# Altium PCB Receiver.PcbDoc
Units mm, origin at the board's own origin, x right, y up, seen from the top; angles counter-clockwise.
Board outline 52.3 x 65 mm, 2 copper layers (Top Layer, Bottom Layer); 12 components, 10 nets, 72 pads, 108 vias.
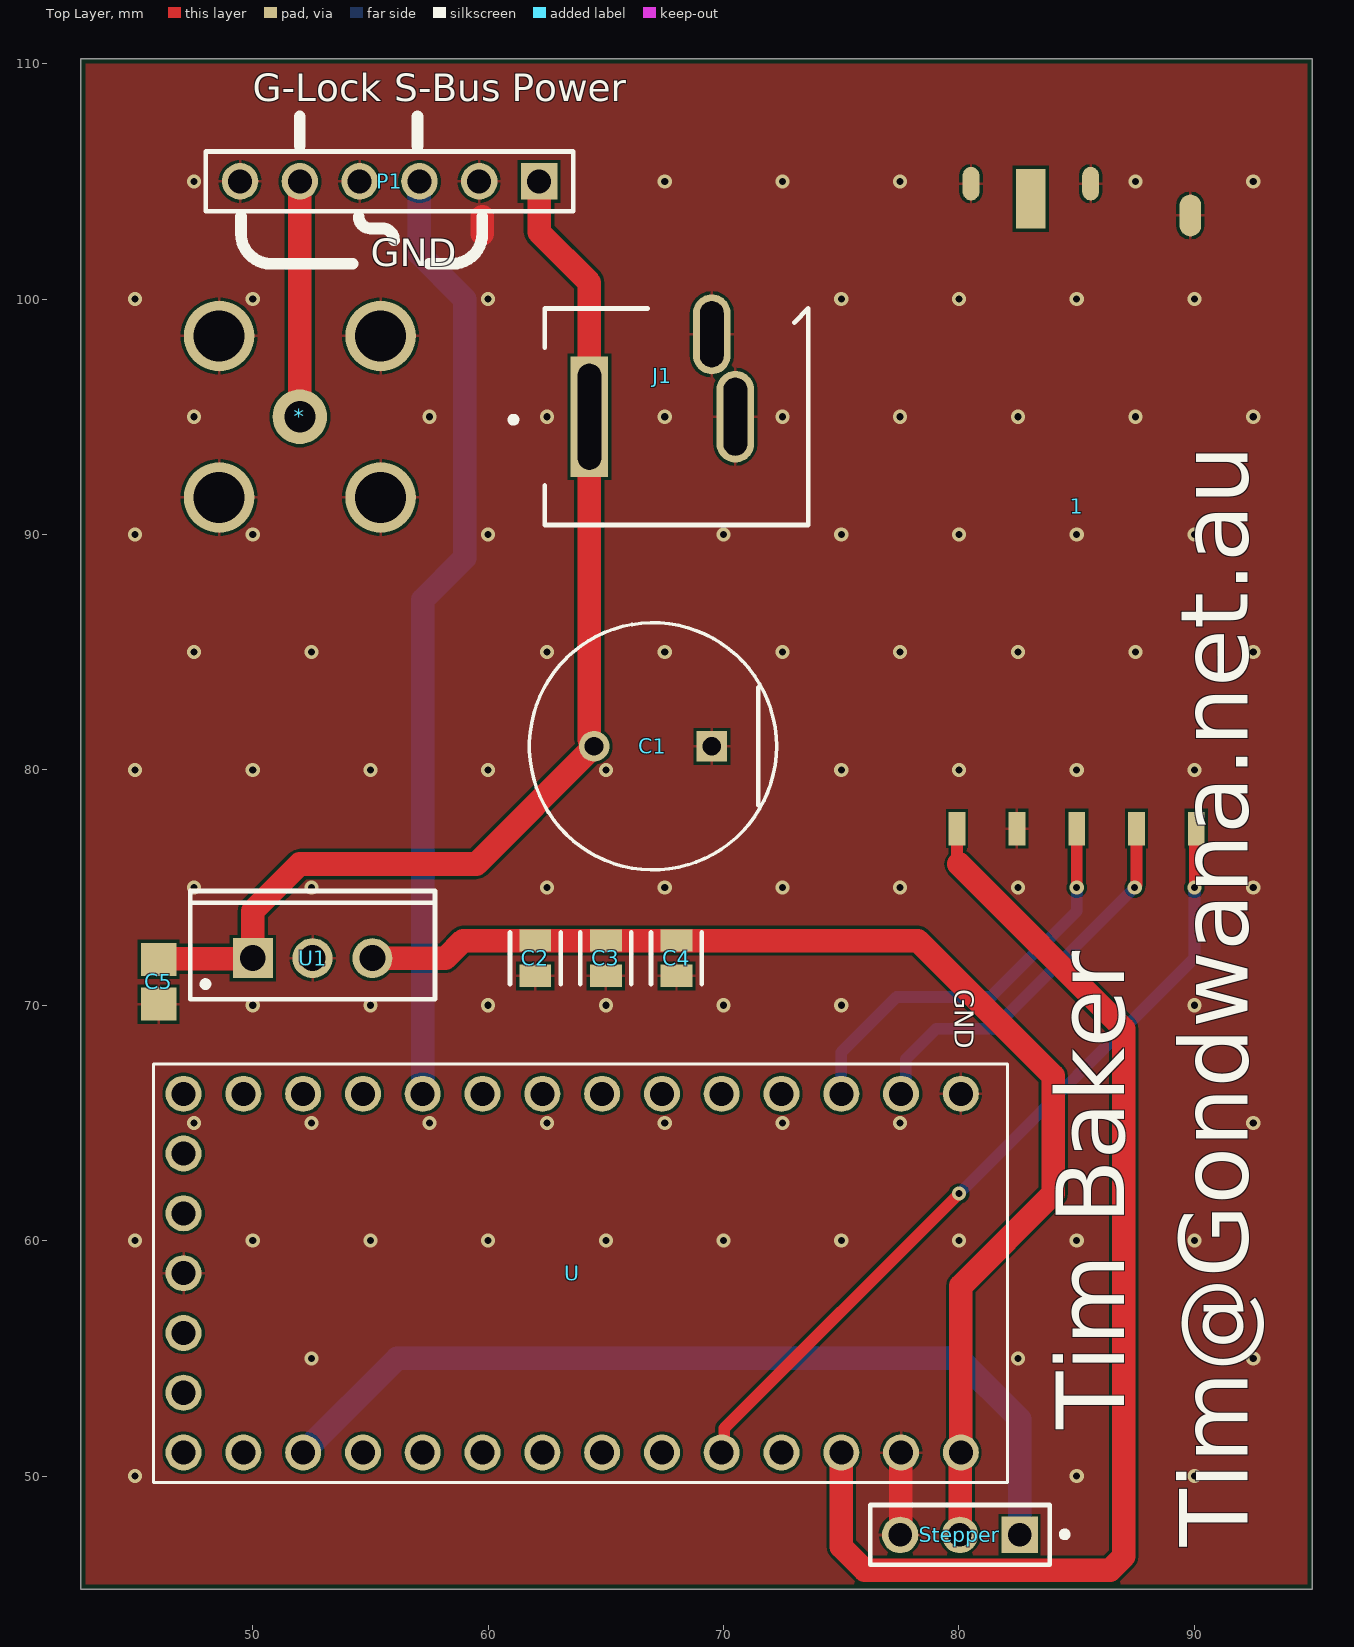
[diagram p0: Top Layer view]
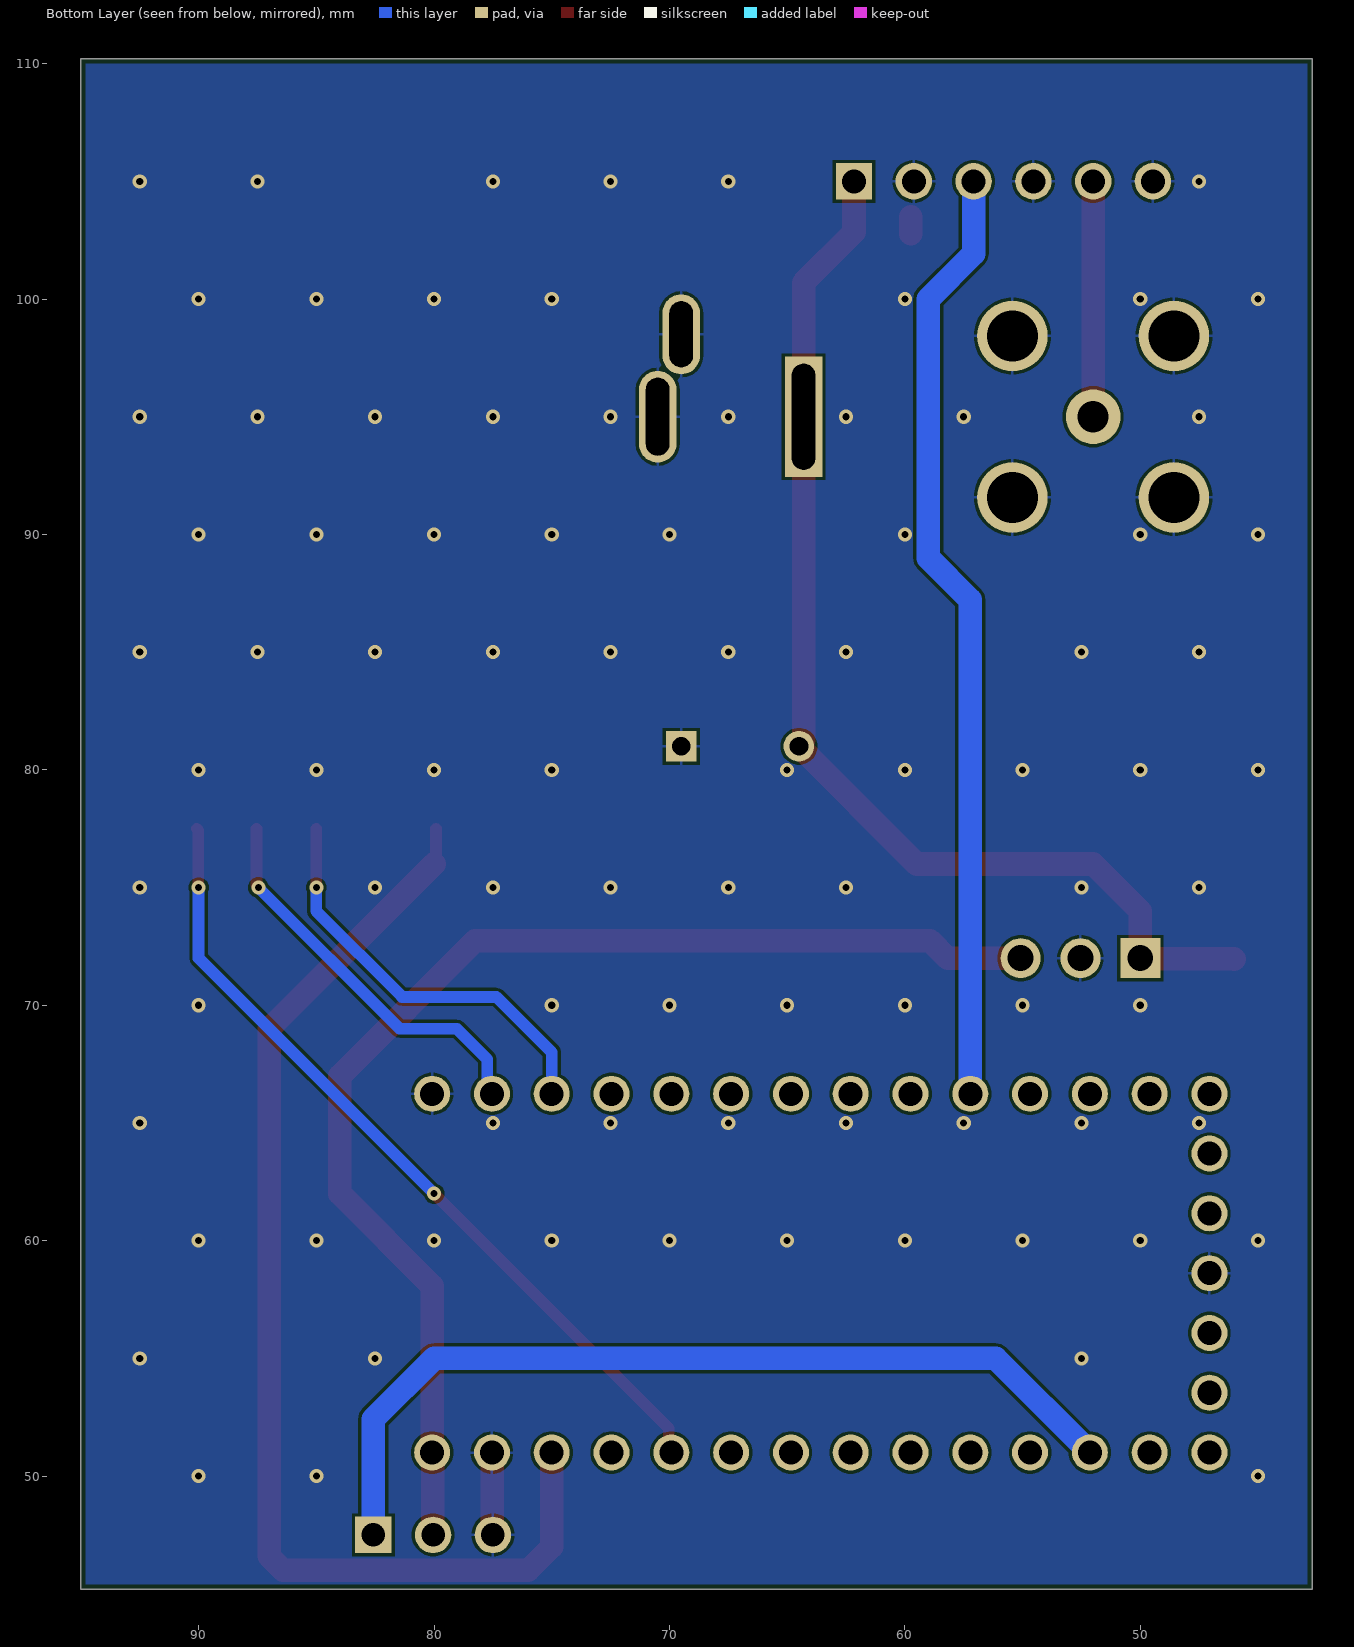
[diagram p1: Bottom Layer view, seen from below]
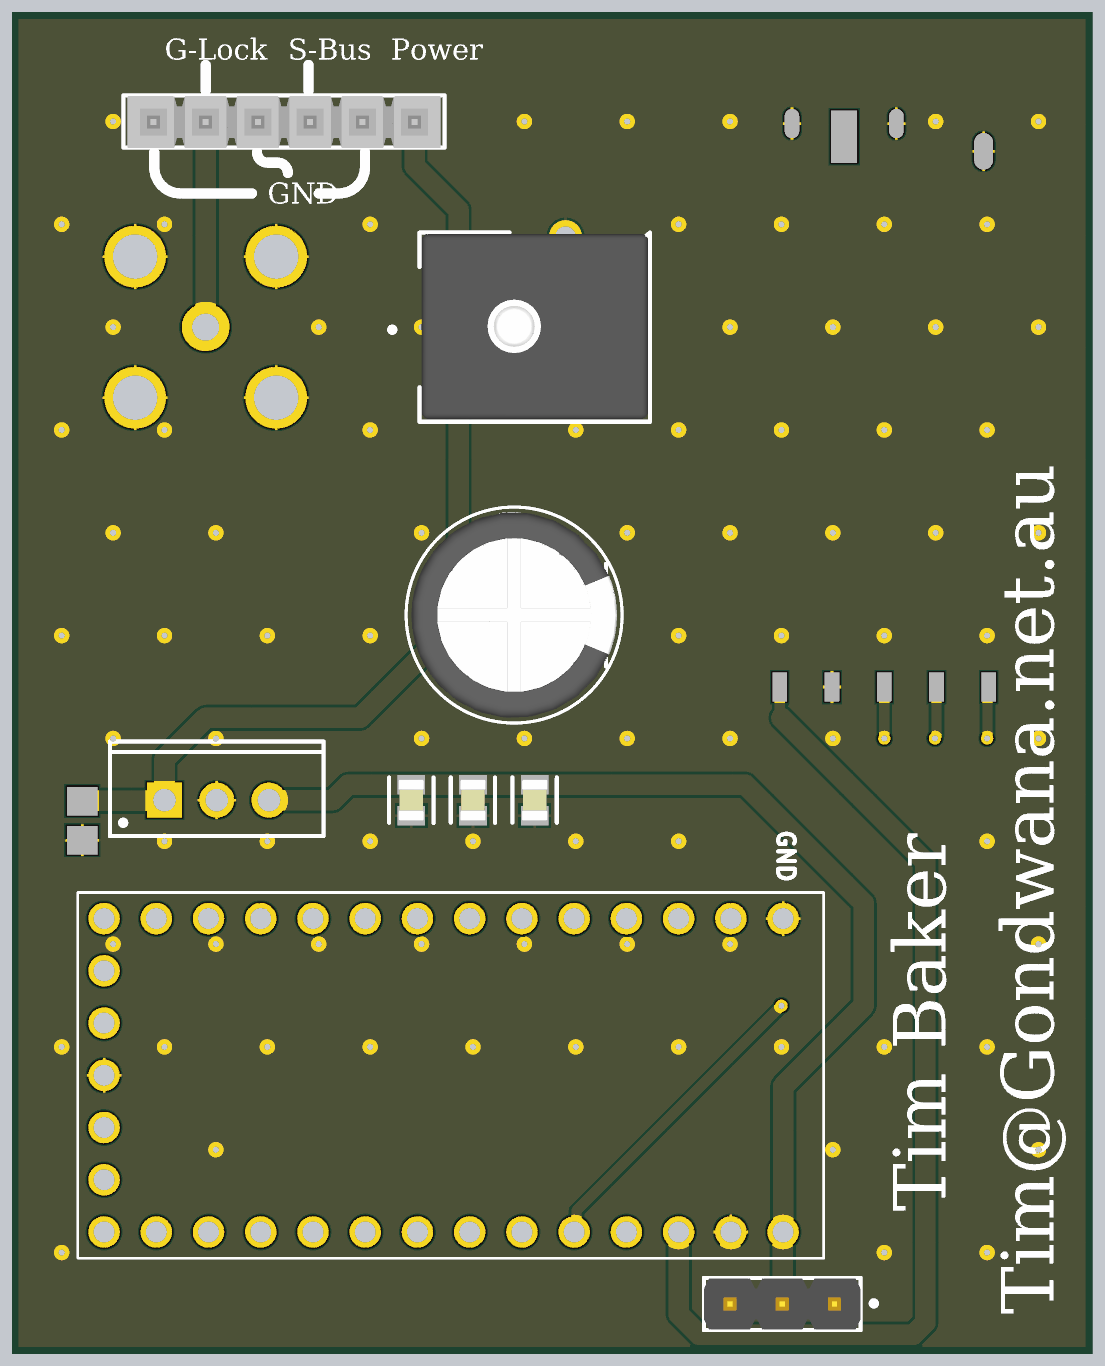
[diagram p2: 3D render of the assembled board from above, using the file's embedded part models]

## Layer stack, top to bottom
Top Solder: solder mask 0.0102, Solder Resist, Dk 3.5
Top Layer: signal copper 0.0356
Dielectric 1: dielectric 0.32, FR-4, Dk 4.8
Bottom Layer: signal copper 0.0356
Bottom Solder: solder mask 0.0102, Solder Resist, Dk 3.5

## Board outline
42.7,45.2 42.7,110.2 95,110.2 95,45.2

## Design rules (kind name [scope] priority, off if disabled: settings)
BoardOutlineClearance [All] p1: gap=0.2 ignorepadtopadclearanceinfootprint=FALSE
Clearance [All] p1: gap=0.127 ignorepadtopadclearanceinfootprint=FALSE except(0.25: Arc-Hole Track-Hole SMDPad-Hole THPad-Hole Via-Hole Fill-Hole Poly-Hole Region-Hole Text-Hole)
ComponentClearance [All] p1: gap=0.127 collisioncheckmode=3 verticalgap=0.127 showdistances=TRUE
DiffPairsRouting [All] p1: maxlimit=0.254 minlimit=0.127 mostfreqgap=0.127 toplayer_minwidth=0.127 toplayer_maxwidth=25.4 toplayer_prefwidth=0.127 bottomlayer_minwidth=0.127 bottomlayer_maxwidth=25.4 bottomlayer_prefwidth=0.127 maxuncoupledlength=12.7
Height [All] p1: minheight=0 maxheight=1816.048 prefheight=12.7
HoleSize [All] p1: absolutevalues=TRUE maxlimit=6.3 minlimit=0.3 maxpercent=80.000 minpercent=20.000
HoleToHoleClearance [All] p1: gap=0.25 allowstackedmicrovias=FALSE
MinimumAnnularRing [All] p1: minimumring=0.076
MinimumSolderMaskSliver [All] p1: minsoldermaskwidth=0
PlaneClearance [All] p1: clearance=0.127
PlaneConnect PlaneConnectPowerPads [InPadClass('PowerPads')] p1: planeconnectstyle=Direct reliefexpansion=0.508 reliefentries=4 reliefconductorwidth=0.254 reliefairgap=0.254
PlaneConnect [All] p2: pad.planeconnectstyle=Relief pad.reliefexpansion=0.3 pad.reliefentries=4 pad.reliefconductorwidth=0.127 pad.reliefairgap=0.127 via.planeconnectstyle=Direct via.reliefexpansion=0.3 via.reliefentries=4 via.reliefconductorwidth=0.127 via.reliefairgap=0.127
PolygonConnect PolygonConnectPowerPads [All vs (InPadClass('PowerPads'))] p1: connectstyle=Direct reliefconductorwidth=0.254 reliefentries=4 polygonreliefangle="90 Angle" airgapwidth=0.254
PolygonConnect [All] p2: thpad.connectstyle=Relief thpad.reliefconductorwidth=0.127 thpad.reliefentries=4 thpad.polygonreliefangle="90 Angle" thpad.airgapwidth=0.127 smdpad.connectstyle=Relief smdpad.reliefconductorwidth=0.127 smdpad.reliefentries=4 smdpad.polygonreliefangle="90 Angle" smdpad.airgapwidth=0.127 via.connectstyle=Direct via.reliefconductorwidth=0.127 via.reliefentries=4 via.polygonreliefangle="90 Angle" via.airgapwidth=0.127
RoutingVias [All] p1: holewidth=0.3 width=0.6 viastyle="Through Hole" minholewidth=0.3 minwidth=0.6 maxholewidth=0.6 maxwidth=6.6
SilkToSilkClearance [All] p1: silktosilkclearance=0
SilkToSolderMaskClearance [IsPad] p1: minsilkscreentomaskgap=0.127 clearancetoexposedcopper=TRUE
SolderMaskExpansion [All] p1: expansion=0.075 istentingtop=FALSE
Width [All] p1: maxlimit=25.4 minlimit=0.127 preferedwidth=1 minimp=50.000000 maximp=50.000000 favimp=50.000000
20 further rules are at their usual default settings.

## Components (designator, comment, footprint, x,y, rotation, side; value= is the part's Value field where it differs from the comment)
1 "HC-12 433MHz module footprint   MCHFIX is for mechanical fix pin which is NC but on this file connected to GND   https://github.com/meendiz/hc-12_si4463/" HC-12_FOOTPRINT 90.08,78.77 r90 top
* "0731711900" 0731711900-Footprint-1 52,95 r0 top
C1 "EEUFK1C102" FP-RAD-TH-D_10_0_5-L_16_1-MFG 67,81 r180 top
C2 "C0805C106K8PACTU" FP-C0805C-DG-MFG 62,72 r90 top value=10uF
C3 "C0805C106K8PACTU" FP-C0805C-DG-MFG 65,72 r270 top value=10uF
C4 "C0805C106K8PACTU" FP-C0805C-DG-MFG 68,72 r270 top value=10uF
C5 "GRM21BR71H104KA01L" CAPC2013X135X45ML10T25 46,71 r270 top
J1 "PJ-044A" FP-PJ-044A-MFG 68,95 r90 top
P1 "TSW-106-07-G-S" SMTC-TSW-106-07-X-S 62.16,105 r180 top
Stepper "90120-0763" FP-90120-0763-MFG 80.04,47.5 r180 top
U "DEV-15583" MODULE_DEV-15583 63.57,58.62 r270 top
U1 "L4940V5" TO220 52.54,72 r0 top

## Footprints (in the part's own frame and the unit in brackets; to place one, negate y for a bottom-side part, rotate by r counter-clockwise, add the part's x,y. Pads: shape width x height; smd on the part's side, far side on the other; paste and mask are expansions set on the pad)
0731711900-Footprint-1 [mm]
  round 2.32 hole 1.32: 1(0,0)
  round 3 hole 2.16: 2(-3.43,-3.43) 3(-3.43,3.43) 4(3.43,3.43) 5(3.43,-3.43)
CAPC2013X135X45ML10T25 [mm] "Chip Capacitor, 2-Leads, Body 2.10x1.35mm, IPC Low Density"
  rect 1.4x1.5 smd: 1(-0.95,0) 2(0.95,0)
  body extent -1.05,-0.67 1.05,0.67, height 1.35
FP-90120-0763-MFG [mm]
  rect 1.55x1.55 hole 1 paste-1000 mask+0: 1(-2.54,0)
  round 1.55 hole 1 paste-1000 mask+0: 2(0,0) 3(2.54,0)
  silkscreen extent -4.58,-1.27 3.81,1.27, body extent -3.91,-1.37 3.91,1.37, height 0.25
FP-C0805C-DG-MFG [mm]
  rect 0.95x1.35 smd paste+0 mask+0: 1(-0.75,0) 2(0.75,0)
  silkscreen extent -1.11,-1.08 1.1,1.07, body extent -1.4,-0.85 1.4,0.85, height 0.25
FP-PJ-044A-MFG [mm]
  rect 5.1x1.6 hole 1 slot 4.5 at 0 deg paste-1000 mask+0: 1(0,3.7)
  rrect100% 3.9x1.6 hole 1 slot 3.3 at 0 deg paste-1000 mask+0: 2(0,-2.5)
  rrect100% 3.4x1.6 hole 1 slot 2.8 at 0 deg paste-1000 mask+0: 3(3.5,-1.5)
  silkscreen extent -4.6,-5.6 4.6,7.05, body extent -4.7,-5.7 5.3,5.7, height 0.25
FP-RAD-TH-D_10_0_5-L_16_1-MFG [mm]
  rect 1.3x1.3 hole 0.8 paste-1000 mask+0: 1(-2.5,0)
  round 1.3 hole 0.8 paste-1000 mask+0: 2(2.5,0)
  silkscreen extent -5.25,-5.25 5.25,5.25, body extent -5.35,-5.35 5.35,5.35, height 0.25
HC-12_FOOTPRINT [mil]
  rect 100x50 smd: ANT(1003.54,276.77)
  rect 56x28 smd: GND(-50,300) RXD(-50,200) SET(-50,0) TXD(-50,100) VCC(-50,400)
  rrect100% 56x28 smd: GND1(1028.74,376.77) GND2(1028.74,176.77)
  rrect100% 70x36 smd: MCHFIX(975.59,9.84)
MODULE_DEV-15583 [mm]
  round 1.53 hole 1.02: 0(-7.62,13.97) 1(-7.62,11.43) 2(-7.62,8.89) 3(-7.62,6.35) 3.3V_1(-2.54,-16.51) 3.3V_2(7.62,11.43) 4(-7.62,3.81) 5(-7.62,1.27) 6(-7.62,-1.27) 7(-7.62,-3.81) 8(-7.62,-6.35) 9(-7.62,-8.89) 10(-7.62,-11.43) 11(-7.62,-13.97) 12(-7.62,-16.51) 13(7.62,-16.51) 14(7.62,-13.97) 15(7.62,-11.43) 16(7.62,-8.89) 17(7.62,-6.35) 18(7.62,-3.81) 19(7.62,-1.27) 20(7.62,1.27) 21(7.62,3.81) 22(7.62,6.35) 23(7.62,8.89) G1(-7.62,16.51) G2(0,-16.51) G3(7.62,13.97) ON-OFF(5.08,-16.51) PGM(2.54,-16.51) VBAT(-5.08,-16.51) VIN(7.62,16.51)
  silkscreen extent -8.89,-17.78 8.89,18.48
SMTC-TSW-106-07-X-S [mm] ".025 SQ Post Terminal Strip Assembly, 1x6 Pins, Vertical, 2.54mm Pitch, Male"
  rect 1.55x1.55 hole 1.02: 1(0,0)
  round 1.55 hole 1.02: 2(2.54,0) 3(5.08,0) 4(7.62,0) 5(10.16,0) 6(12.7,0)
  silkscreen extent -1.46,-1.27 14.16,1.27, body extent -1.27,-1.24 13.97,1.3, height 8.38
TO220 [mm] "TO, Thru-Hole, Vertical, Heatsink Mounted; 3 In-Line Leads; Pitch 2.54 mm"
  rect 1.7x1.7 hole 1.1: 1(-2.54,0)
  round 1.7 hole 1.1: 2(0,0) 3(2.54,0)
  silkscreen extent -5.2,-1.75 5.2,2.85, body extent -5.25,-1.8 5.25,2.9, height 19.7

## Part data
1: library part HC-12_FOOTPRINT, DeviceSetName=HC-12_FOOTPRINT, GateName_1=G$1, LibraryName=hc12_433mhz, Package=HC-12_FOOTPRINT, SymbolName_1=HC-12_FOOTPRINT
*: library part CMP-002-00075-1, "Rf Coax Conn, Bnc, Jack, 75 Ohm, Pcb"
C1: library part CMP-05427-001094-1, "Aluminum Electrolytic Capacitors (Radial Lead Type) AEC-Q200 Qualified 1000uF ±20% 16V", Capacitance=1mF, Case/Package=Radial, Dielectric Material=Aluminium, Max Operating Temperature=105°C, Min Operating Temperature=-55°C, Ripple Current=1.24A, Tolerance=20%, Voltage=16V, Construction=RADIAL, Diameter=10mm, Height=16mm, Impedance=49mR, Lead Diameter=0.6mm, Lead Pitch=5mm, Life (Hours)=4000Hour, Mount="Through Hole", Number of Pins=2, packaging=Bulk, Radiation Hardening=No, REACH SVHC="No SVHC", RoHS Compliant=Yes, Series="FK Radial", Termination=Radial, Voltage Rating=16V, Voltage Rating (DC)=16V
C2 C3 C4: library part CMP-2007-03243-2, "CAP CER 10UF 10V X5R 0805", 3DS Part Number=220-00001, Capacitance=10uF, manufacturer=Kemet, Package=C0805C-DG, Temperature="-55°C to +85°C", Temperature Characteristic=X5R, Temperature Coefficient=15%, Temperature Range High=+85°C, Temperature Range Low=-55°C, Tolerance=10%, Voltage=10V, Automotive=No, Category=Cap, ComponentLink2Description=Datasheet, ComponentLink2URL=https://content.kemet.com/datasheets/KEM_C1006_X5R_SMD.pdf, Device Class L1="Passive Components", Device Class L2=Capacitors, Device Class L3="Ceramic Capacitors", Digikey Description="CAP CER 10UF 10V X5R 0805", Height=1.4mm, Ipc Land Pattern Name=CAPC200125X125, Lead Free=Yes, Manufacturer Part Number=C0805C106K8PACTU, Material=Ceramic, Mouser Description="CAP CER 10UF 10V X5R 0805", Octopart=https://octopart.com/c0805c106k8pactu-kemet-98697, RoHS=TRUE, Voltage Rating=10V
C5: library part CMP-2100-03644-1, "Chip Capacitor, 0.1 uF, +/- 10%, 50 V, -55 to 125 degC, 0805 (2012 Metric), RoHS, Tape and Reel", Capacitance=100nF, Case Code (Imperial)=0805, Case Code (Metric)=2012, Dielectric=X7R, Dielectric Material=Ceramic, Insulation Resistance=10GR, manufacturer=Murata, Max Operating Temperature=125degC, Min Operating Temperature=-55degC, Package Description="2-Pin Surface Mount Device, Body 2 x 1.25 mm", Package Quantity=1, Tolerance=10%, Voltage=50V, Case/Package=0805, Datasheet URL=http://psearch.en.murata.com/capacitor/product/GRM21BR71H104KA01%23.pdf, Datasheet Version=42675.0, Depth=1.25mm, Height=1.25mm, Lead Free=LeadFree, Length=2mm, Manufacturer URL=http://www.murata.com/, Material=Ceramic, Mount=SurfaceMount, Number of Pins=2, Package Reference=0805, packaging=TapeandReel, Radiation Hardening=No, REACH SVHC=Unknown, RoHSCompliant=true, Termination=SMD/SMT, Thickness=0.053inch, Voltage Rating=50V, Voltage Rating (DC)=50V, Width=0.049inch
J1: library part CMP-14830-000003-1, "CONN PWR JACK 2X5.5MM SOLDER", Current Rating=2.5A, manufacturer="CUI Inc", Temperature="-25°C to +85°C", Temperature Range High=+85°C, Temperature Range Low=-25°C, Voltage Rating=24V, Automotive=No, Category=Conn, ComponentLink2Description=Datasheet, ComponentLink2URL=https://www.cui.com/product/resource/pj-044a.pdf, Conn Gender=Male, Conn Orientation=Vertical, Contact Material=Tin,Nickel, Device Class L1=Connectors, Device Class L2="Power Connectors", Device Class L3=unset, Digikey Description="CONN PWR JACK 2X5.5MM SOLDER", Height=14.4mm, Lead Free=Yes, Manufacturer Part Number=PJ-044A, Mouser Description="2.0 mm Center Pin, 2.5 A, Vertical, Through Hole, Dc Power Jack Connector", Number of Contacts=3, Octopart=https://octopart.com/pj-044a-cui-19052775, Package=PJ-044A, RoHS=TRUE, Standoff Height=0.4mm
P1: library part CMP-1024-00383-1, "0.025\" SQ Post Header, Through-hole, Vertical, -55 to 125 degC, 2.54 mm Pitch, 6-Pin, Male, RoHS", manufacturer=Samtec, Temperature Range="-55 to 125 degC", ComponentLink1Description="Manufacturer URL", ComponentLink1URL=http://www.samtec.com, ComponentLink2Description=Datasheet, ComponentLink2URL=http://www.samtec.com/documents/webfiles/pdf/TSW_TH.PDF, ComponentLink3Description="Package Specification", ComponentLink3URL=http://www.samtec.com/documents/webfiles/cpdf/TSW-XXX-XX-XXX-X-XX-XXX-MKT.pdf, DatasheetVersion=F-214, Mounting Technology=Through-hole, Orientation=Vertical, PackageDescription=".025[0.64] SQ. Post Terminal Strip Assembly", PackageReference=TSW-106-07-X-S, PackageVersion="DM, 8/1988", PartNumber=TSW-106-07-G-S, Pitch="2.54 mm", RoHS=True
Stepper: library part CMP-04776-000084-1, "CONN HEADER VERT 3POS 2.54MM", Current Rating=3A, manufacturer=Molex, Temperature="-55°C to +125°C", Temperature Range High=+125°C, Temperature Range Low=-55°C, Voltage Rating=350V, Automotive=No, Category=Conn, ComponentLink2Description=Datasheet, ComponentLink2URL=https://www.molex.com/webdocs/datasheets/pdf/en-us/0901200763_PCB_HEADERS.pdf, Conn Gender=Male, Conn Orientation=Vertical, Contact Material=Gold,Nickel, Device Class L1=Connectors, Device Class L2="Headers and Wire Housings", Device Class L3=unset, Digikey Description="CONN HEADER VERT 3POS 2.54MM", Footprint Url=https://www.molex.com/pdm_docs/sd/901200763_sd.pdf, Height=5.8mm, Lead Free=Yes, Manufacturer Part Number=90120-0763, Mouser Description="Board-To-Board Connector, C-Grid III 90120 Series, Through Hole, Header, 3, 2.54 mm", Number of Contacts=3, Number of Rows=1, Octopart=https://octopart.com/90120-0763-molex-655433, Package=90120-0763, Pitch=2.54mm, RoHS=TRUE
U: "RT1062 Teensy 4.0 i.MX ARMÂ® CortexÂ®-M7 MPU Embedded Evaluation Board", Package=None, Digi-Key_Part_Number=1568-DEV-15583-ND, Digi-Key_Purchase_URL=https://www.digikey.com/product-detail/en/sparkfun-electronics/DEV-15583/1568-DEV-15583-ND/10384551?utm_source=snapeda&utm_medium=aggregator&utm_campaign=symbol, MF="SparkFun Electronics", MP=DEV-15583, SnapEDA_Link=https://www.snapeda.com/parts/DEV-15583/SparkFun%20Electronics/view-part/4001229/?ref=snap
U1: library part CMP-0244-00429-1, "1.5A Very Low Drop Regulator, 3-Pin TO-220", ComponentLink1Description="Manufacturer URL", ComponentLink1URL=http://www.st.com, ComponentLink2Description=Datasheet, ComponentLink2URL=http://www.st.com/internet/com/TECHNICAL_RESOURCES/TECHNICAL_LITERATURE/DATASHEET/CD00000442.pdf, ComponentLink3Description="Package Specification", ComponentLink3URL=http://www.st.com/internet/com/TECHNICAL_RESOURCES/TECHNICAL_LITERATURE/PACKAGE_INFORMATION/CD00004649.pdf, DatasheetVersion=16/12/2009, PackageDescription="TO, Thru-Hole, Vertical, Heatsink Mounted; 3 In-Line Leads; Pitch 2.54 mm", PackageReference=TO220, PackageVersion=ver3.0

## Via types
v1: diameter 0.6, hole 0.3, Top Layer to Bottom Layer, 108 vias

## Nets (pads, with @x,y where several pads share a name; then routed paths per layer and width w, separated by ;. In a path a pad name is that pad's centre, name@x,y a point inside that pad or via, vN(x,y) a via of type N, cw(c..) or ccw(c..) an arc to the next point about the centre after c; other vN are vias at no path point)
3V3: 1.VCC U.3.3V_2 | length 50.5
  Top Layer w0.5: 1.VCC 79.92,76.08 80,76
  Top Layer w1: U.3.3V_2 75,47 76,46 86.414,46 87,46.586 87,69 80,76
+5: C2.2 C3.1 C4.1 Stepper.2 U1.3 U.VIN | length 52.8
  Top Layer w1: U1.3 58.185,72 58.935,72.75 C2.2 C3.1 C4.1 78.25,72.75 84,67 84,62 80.08,58.08 U.VIN 80.06,50.98 80.06,47.52 Stepper.2
GEN_LOCK: *.1 P1.5 | length 10
  Top Layer w1: *.1 P1.5
GND: 1.GND 1.GND1 1.GND2 1.MCHFIX *.2 *.3 *.4 *.5 C1.1 C2.1 C3.2 C4.2 C5.2 J1.2 J1.3 P1.2 P1.4 P1.6 Stepper.3 U1.2 U.G1 U.G2 U.G3 | length 4.2
  Top Layer w1: 59.75,102.77 59.75,103.5 ; Stepper.3 77.52,47.52 77.52,50.98 U.G3
  other v1: 45,50 85,50 90,50 52.5,55 82.5,55 92.5,55 45,60 50,60 55,60 55,60 60,60 65,60 65,60 70,60 75,60 75,60 80,60 85,60 85,60 90,60 47.5,65 52.5,65 57.5,65 62.5,65 67.5,65 72.5,65 77.5,65 92.5,65 50,70 50,70 55,70 60,70 60,70 65,70 70,70 70,70 75,70 90,70 47.5,75 52.5,75 62.5,75 67.5,75 72.5,75 77.5,75 82.5,75 92.5,75 45,80 50,80 55,80 55,80 60,80 65,80 65,80 75,80 75,80 80,80 85,80 85,80 90,80 47.5,85 52.5,85 62.5,85 67.5,85 72.5,85 77.5,85 82.5,85 87.5,85 92.5,85 45,90 50,90 50,90 60,90 60,90 70,90 70,90 75,90 80,90 80,90 85,90 90,90 47.5,95 57.5,95 62.5,95 67.5,95 72.5,95 77.5,95 82.5,95 87.5,95 92.5,95 45,100 50,100 60,100 75,100 75,100 80,100 85,100 85,100 90,100 47.5,105 67.5,105 72.5,105 77.5,105 87.5,105 92.5,105
HC_12_SET: 1.SET U.22 | length 34.9
  Top Layer w0.5: U.22 70.031,51.111 70.031,52.031 v1(80,62) ; v1(90,75) 90.019,75.019 90.019,77.439 1.SET
  Bottom Layer w0.5: v1(80,62) 90,72 v1(90,75)
RX1: 1.TXD U.0 | length 16.8
  Top Layer w0.5: v1(87.464,75.002) 87.464,75.029 87.54,75.105 1.TXD
  Bottom Layer w0.5: U.0 77.737,66.437 77.737,67.707 79.03,69 81.462,69 v1(87.464,75.002)
S_BUS: P1.3 U.8 | length 40.3
  Bottom Layer w1: P1.3 57.08,101.92 59,100 59,89 57.22,87.22 U.8
SERVO_PWM: Stepper.1 U.15 | length 38.1
  Bottom Layer w1: U.15 56.14,55 80,55 82.58,52.42 Stepper.1
TX1: 1.RXD U.1 | length 17.7
  Top Layer w0.5: v1(85,75) 1.RXD
  Bottom Layer w0.5: U.1 75,68 77.357,70.357 81.357,70.357 85,74 v1(85,75)
V_BAT: C1.2 C5.1 J1.1 P1.1 U1.1 | length 48.4
  Top Layer w1: C5.1 46.025,71.975 49.975,71.975 U1.1 50,74 52,76 59.5,76 C1.2 64.5,81.081 64.3,81.281 J1.1 64.3,100.7 62.16,102.84 P1.1
pads on no net: 1.ANT U.2 U.3 U.3.3V_1 U.4 U.5 U.6 U.7 U.9 U.10 U.11 U.12 U.13 U.14 U.16 U.17 U.18 U.19 U.20 U.21 U.23 U.ON-OFF U.PGM U.VBAT

## Polygon pours and split planes (outlines as drawn)
GND on Bottom Layer "GND_L02_P001" (solid, pour order 1): 41,44 41,112 97,112 97,44 59,44
GND on Top Layer "GND_L01_P002" (solid, pour order 2): 41,44 41,112 97,112 97,44 59,44

## Silkscreen, mask and mechanical layers (free items; w line width, h text height)
Top Overlay:
  lines w0.5: 49.5,103.5 49.5,103.25 49.5,102.77 ccw(c50.77,102.77) 50.77,101.5 54.25,101.5 ; 52,106.5 52,107.75 ; 54.5,103.5 ccw(c55,103.5) 55,103 55.5,103 cw(c55.5,102.5) 56,102.5 ; 57,106.5 57,107.75 ; 57.5,101.5 58.48,101.5 ccw(c58.48,102.77) 59.75,102.77 59.75,103.5
  text "G-Lock" at 50.001,108.011 h2
  text "S-Bus" at 56.001,108.011 h2
  text "Power" at 61.001,108.011 h2
  text "GND" at 55.001,101.011 h2
  text "Tim Baker" at 87.972,52 h5 r90
  text "Tim@Gondwana.net.au" at 93.226,47 h5 r90
BoardOutline:
  the board outline again, w0.254

## Text inside footprints (layer, text, board x,y; h text height)
U: Top 3D Body "GND" at 79.826,70.685 h0.81 r270; Top Overlay "GND" at 79.826,70.685 h0.81 r270